# Altium PCB PCB.PcbDoc
Units mm, origin at the board's own origin, x right, y up, seen from the top; angles counter-clockwise.
Board outline 143.89 x 66.55 mm, 2 copper layers (Top Layer, Bottom Layer); 72 components, 28 nets, 160 pads, 648 vias.
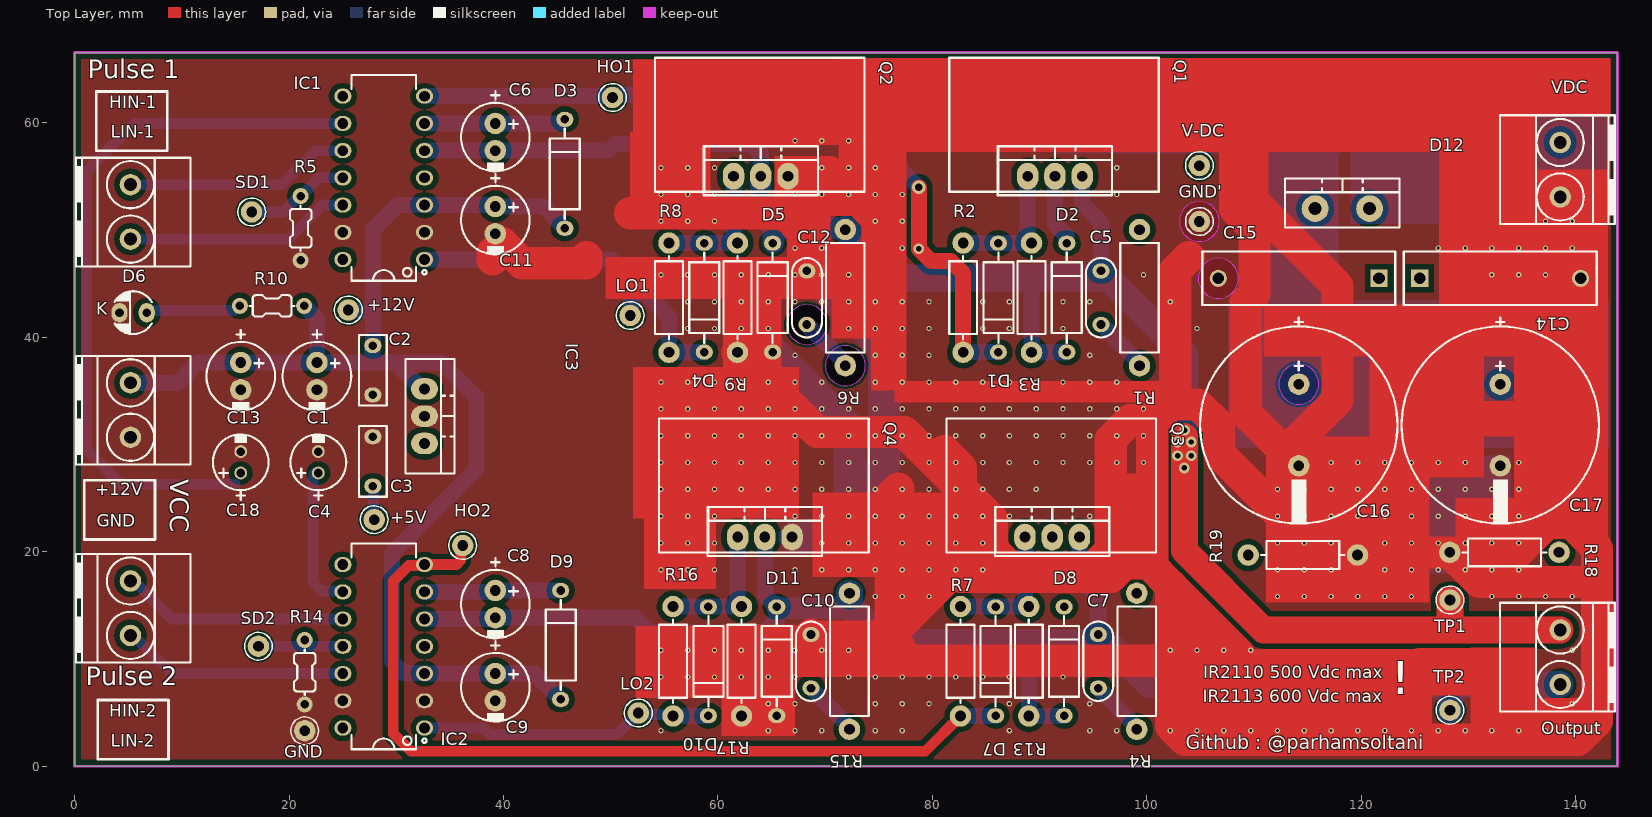
[diagram p0: Top Layer view]
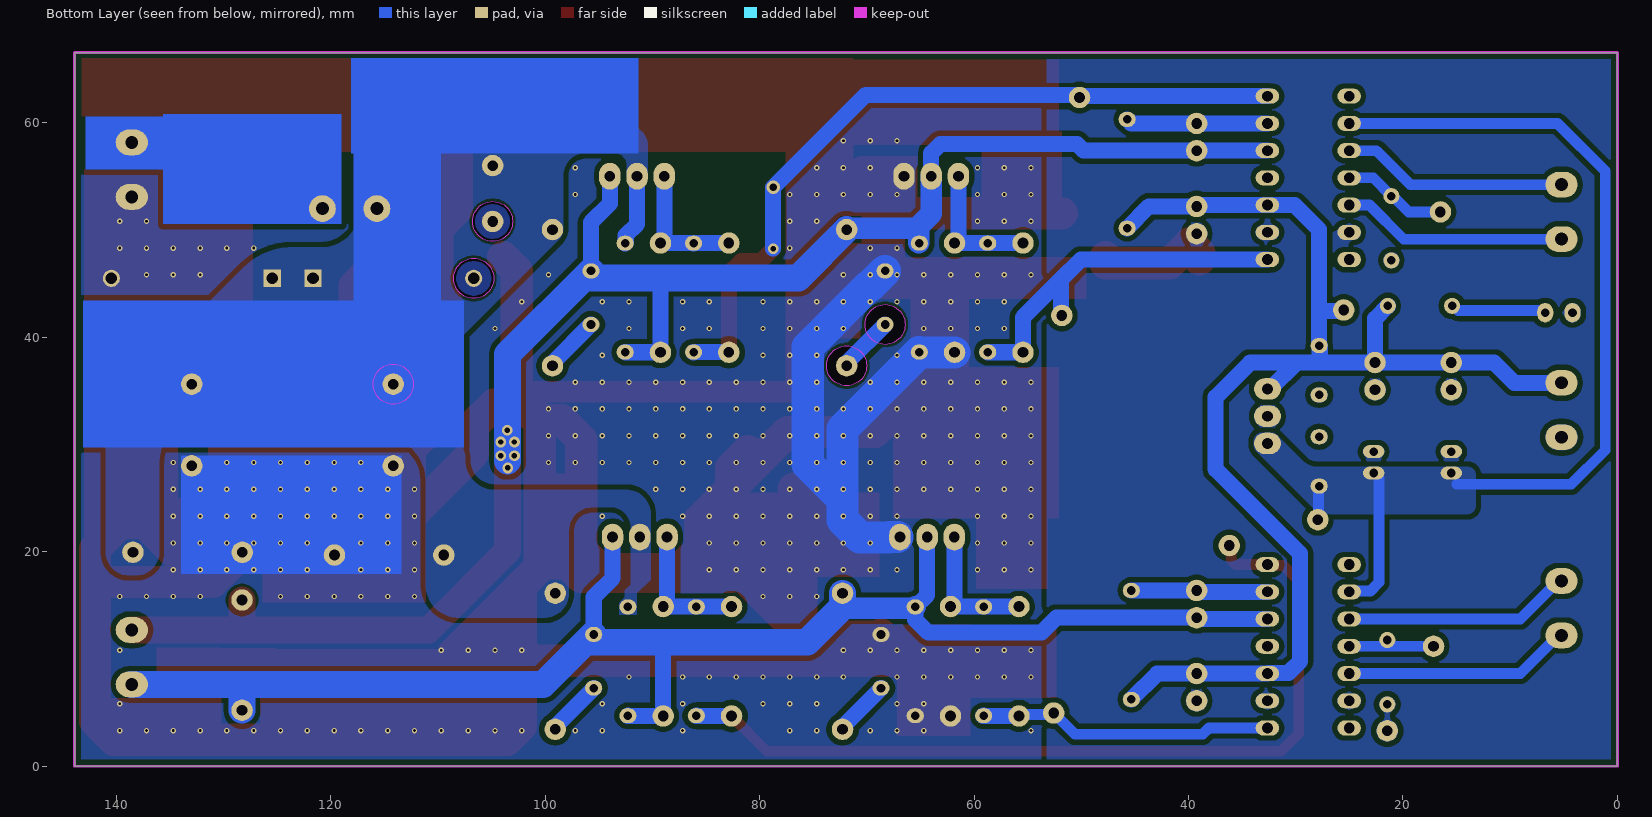
[diagram p1: Bottom Layer view, seen from below]
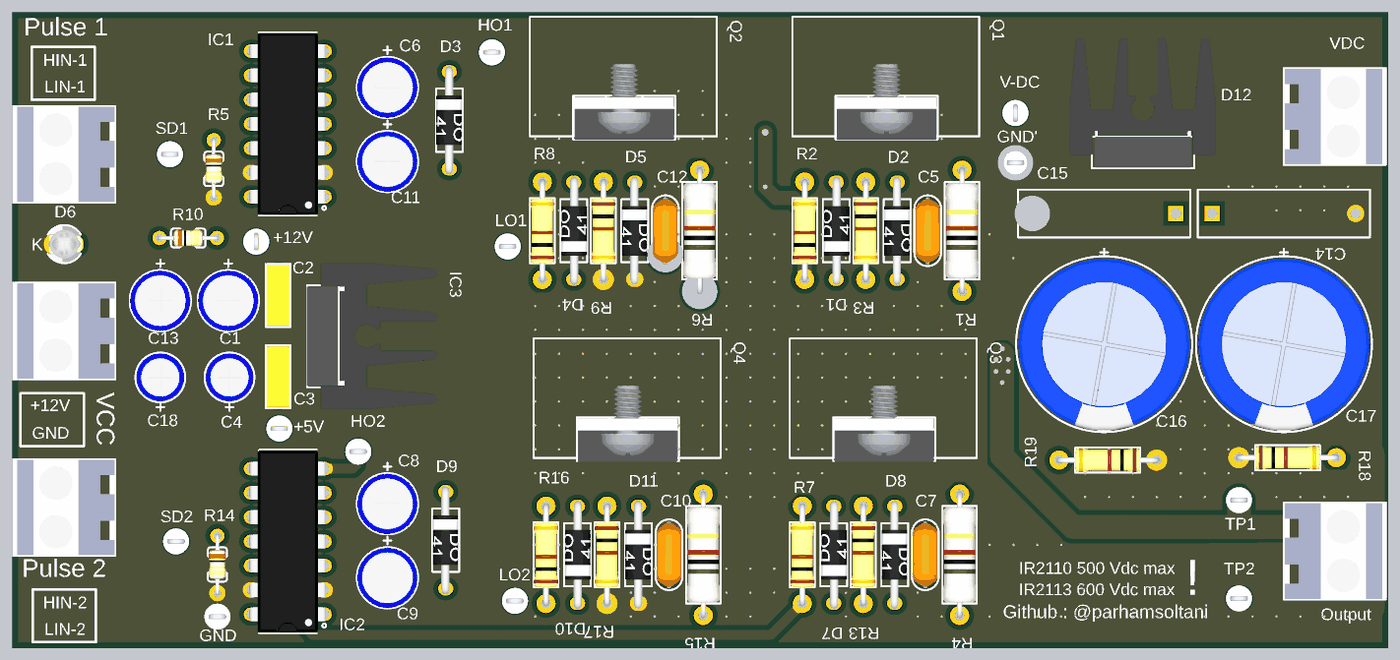
[diagram p2: 3D render of the assembled board from above, using the file's embedded part models]

## Layer stack, top to bottom
Top Solder: solder mask 0.0102, Solder Resist, Dk 3.5
Top Layer: signal copper 0.0356
Dielectric 1: dielectric 0.32, FR-4, Dk 4.8
Bottom Layer: signal copper 0.0356
Bottom Solder: solder mask 0.0102, Solder Resist, Dk 3.5

## Board outline
0,0 143.891,0 143.891,66.548 0,66.548
cut-out: 66.431,41.188 ccw(c68.297,41.188) 68.297,39.322 ccw(c68.297,41.188) 70.163,41.188 ccw(c68.297,41.188) 68.297,43.054 ccw(c68.297,41.188)
cut-out: 70.021,37.338 ccw(c71.887,37.338) 71.887,35.472 ccw(c71.887,37.338) 73.753,37.338 ccw(c71.887,37.338) 71.887,39.204 ccw(c71.887,37.338)
cut-out: 104.801,45.495 ccw(c106.667,45.495) 106.667,43.629 ccw(c106.667,45.495) 108.533,45.495 ccw(c106.667,45.495) 106.667,47.361 ccw(c106.667,45.495)
cut-out: 112.307,35.623 ccw(c114.173,35.623) 114.173,33.757 ccw(c114.173,35.623) 116.039,35.623 ccw(c114.173,35.623) 114.173,37.489 ccw(c114.173,35.623)
cut-out: 103.036,50.8 ccw(c104.902,50.8) 104.902,48.934 ccw(c104.902,50.8) 106.768,50.8 ccw(c104.902,50.8) 104.902,52.666 ccw(c104.902,50.8)

## Design rules (kind name [scope] priority, off if disabled: settings)
Clearance [All] p1: gap=0.254 ignorepadtopadclearanceinfootprint=FALSE except(0: Arc-Hole Track-Hole SMDPad-Hole THPad-Hole Via-Hole Fill-Hole Poly-Hole Region-Hole Text-Hole; 0.5: Arc-Poly Track-Poly SMDPad-Poly THPad-Poly Via-Poly Fill-Poly Poly-Poly)
PolygonConnect [All] p1: connectstyle=Direct reliefconductorwidth=0.254 reliefentries=4 polygonreliefangle="90 Angle" airgapwidth=0.254
RoutingVias [All] p1: holewidth=0.5 width=1 viastyle="Through Hole" minholewidth=0.1 minwidth=0.2 maxholewidth=2.5 maxwidth=3
SolderMaskExpansion [All] p1: expansion=0.102 istentingtop=FALSE
Width [All] p1: maxlimit=3 minlimit=0.15 preferedwidth=0.7
30 further rules are at their usual default settings.

## Components (designator, comment, footprint, x,y, rotation, side; value= is the part's Value field where it differs from the comment)
+5V "+5V" TPTHD_B_WHT 27.94,22.987 r0 top
+12V "+12V" TPTHD_B_WHT 25.527,42.545 r90 top
C1 "100uF, 25V" C_EL_6X11 22.604,36.369 r270 top
C2 "100nF" C_PLY_6X2_5 27.813,36.919 r90 top
C3 "100nF" C_PLY_6X2_5 27.813,28.419 r270 top
C4 "100uF, 10V" C_EL_5X11 22.733,28.337 r90 top
C5 "4.7nf, 1kV" RAD0.2-1 95.729,43.688 r90 top
C6 "100uF, 25V" C_EL_6X11 39.243,58.674 r270 top
C7 "4.7nf, 1kV" RAD0.2-1 95.475,9.779 r90 top
C8 "100uF, 25V" C_EL_6X11 39.243,15.113 r270 top
C9 "100uF, 25V" C_EL_6X11 39.243,7.366 r270 top
C10 "4.7nf, 1kV" RAD0.2-1 68.678,9.779 r90 top
C11 "100uF, 25V" C_EL_6X11 39.243,50.927 r270 top
C12 "4.7nf, 1kV" RAD0.2-1 68.297,43.688 r90 top
C13 "100uF, 25V" C_EL_6X11 15.494,36.369 r270 top
C14 "220nF, 600V" CAP-pitch15 132.963,45.495 r0 top
C15 "220nF, 600V" CAP-pitch15 114.167,45.495 r180 top
C16 "100uF, 500V" C_EL_18X35 114.173,31.813 r270 top
C17 "100uF, 500V" C_EL_18X35 132.969,31.813 r270 top
C18 "100uF, 10V" C_EL_5X11 15.494,28.337 r90 top
D1 "1N5818" D_AX04_DO41 86.159,43.688 r270 top
D2 "UF4007" D_AX04_DO41 92.539,43.688 r90 top
D3 "1N5818" D_AX04_DO41 45.72,55.245 r90 top
D4 "1N5818" D_AX04_DO41 58.727,43.688 r270 top
D5 "UF4007" D_AX04_DO41 65.107,43.688 r90 top
D6 "LED RED" LED3MM 5.461,42.291 r180 top
D7 "1N5818" D_AX04_DO41 85.905,9.779 r270 top
D8 "UF4007" D_AX04_DO41 92.285,9.779 r90 top
D9 "1N5818" D_AX04_DO41 45.339,11.303 r90 top
D10 "1N5818" D_AX04_DO41 59.108,9.779 r270 top
D11 "UF4007" D_AX04_DO41 65.488,9.779 r90 top
D12 "RHRP1560" TO220_21 118.237,52.003 r0 top
GND "GND" TPTHD_B_WHT 21.463,3.302 r0 top
GND' "HO" TPTHD_B_WHT 104.902,50.8 r0 top
HO1 "HO" TPTHD_B_WHT 50.165,62.357 r0 top
HO2 "HO" TPTHD_B_WHT 36.195,20.574 r0 top
IC1 "IR2110" DIP_14 28.829,54.864 r180 top
IC2 "IR2110" DIP_14 28.829,11.176 r180 top
IC3 "7805" TO220_3 32.639,32.639 r270 top
LO1 "LO" TPTHD_B_WHT 51.816,42.037 r0 top
LO2 "LO" TPTHD_B_WHT 52.578,4.953 r0 top
Output "Output" TBG_2 138.557,10.16 r270 top
"Pulse 1" "" TBG_2 5.207,51.689 r90 top
"Pulse 2" "" TBG_2 5.207,14.732 r90 top
Q1 "FCP22N60N" TO220_32 91.429,55.017 r0 top
Q2 "FCP22N60N" TO220_32 63.997,55.017 r0 top
Q3 "FCP22N60N" TO220_32 91.175,21.362 r0 top
Q4 "FCP22N60N" TO220_32 64.378,21.362 r0 top
R1 "10R, 1/2W" R05W_AX05 99.319,43.688 r270 top
R2 "10R, 1/4W" R025W_AX04 82.869,43.688 r90 top
R3 "10K, 1/4W" R025W_AX04 89.249,43.688 r270 top
R4 "10R, 1/2W" R05W_AX05 99.065,9.779 r270 top
R5 "0R, 1/8W" R0125W_AX025 21.082,50.165 r90 top
R6 "10R, 1/2W" R05W_AX05 71.887,43.688 r270 top
R7 "10R, 1/4W" R025W_AX04 82.615,9.779 r90 top
R8 "10R, 1/4W" R025W_AX04 55.437,43.688 r90 top
R9 "10K, 1/4W" R025W_AX04 61.817,43.688 r270 top
R10 "2k7, 1/8W" R0125W_AX025 18.415,42.926 r180 top
R13 "10K, 1/4W" R025W_AX04 88.995,9.779 r270 top
R14 "0R, 1/8W" R0125W_AX025 21.463,8.763 r90 top
R15 "10R, 1/2W" R05W_AX05 72.268,9.779 r270 top
R16 "10R, 1/4W" R025W_AX04 55.818,9.779 r90 top
R17 "10K, 1/4W" R025W_AX04 62.198,9.779 r270 top
R18 "100K, 1/4W" R025W_AX04 133.35,19.939 r0 top
R19 "100K, 1/4W" R025W_AX04 114.554,19.685 r180 top
SD1 "SD" TPTHD_B_WHT 16.51,51.689 r0 top
SD2 "SD" TPTHD_B_WHT 17.145,11.176 r0 top
TP1 "HO" TPTHD_B_WHT 128.27,15.494 r0 top
TP2 "HO" TPTHD_B_WHT 128.27,5.207 r0 top
V-DC "HO" TPTHD_B_WHT 104.902,56.007 r90 top
VCC "" TBG_2 5.207,33.21 r90 top
VDC "" TBG_2 138.557,55.626 r270 top

## Footprints (in the part's own frame and the unit in brackets; to place one, negate y for a bottom-side part, rotate by r counter-clockwise, add the part's x,y. Pads: shape width x height; smd on the part's side, far side on the other; paste and mask are expansions set on the pad)
C_EL_5X11 [mm] "Cap Elec, D5.0X11.0H pitch: 2mm"
  round 1.2 / inner round 1.2 / far side oval 1.2x2 hole 0.8: 1(-1,0) 2(1,0)
  silkscreen extent -3.5,-2.6 2.6,2.6, body extent -2.53,-2.53 2.53,2.53, height 2.67
C_EL_6X11 [mm] "Cap Elec, D6.3X11.0H pitch: 2.5mm"
  round 2 hole 1: 1(-1.27,0) 2(1.27,0)
  silkscreen extent -4.3,-3.2 3.2,3.2, body extent -3.17,-3.18 3.18,3.18, height 2.51
C_EL_18X35 [mm] "Cap Elec, D18.0X35.0H pitch: 7.6mm, RB.3/.7"
  round 2 hole 1: 1(-3.81,0) 2(3.81,0)
  silkscreen extent -10,-9.2 9.2,9.2, body extent -10.42,-10.42 10.47,10.41, height 35.05
C_PLY_6X2_5 [mm] "CAP, FILM MKT, 6.3X2.4mm, pitch: 4.7mm"
  oval 1.4x1.6 hole 0.8 mask+0.075: 1(-2.3,0) 2(2.3,0)
  silkscreen extent -3.3,-1.3 3.3,1.3, body extent -3.15,-1.2 3.15,1.2, height 6.34
CAP-pitch15 [mm] "THD, 2-leads, Body 18x5mm, Pitch 15mm"
  rect 1.6x1.6 hole 1.1: 1(-7.5,0)
  round 1.6 hole 1.1: 2(7.5,0)
  silkscreen extent -9,-2.5 9,2.5, body extent -9,-2.5 9,2.5, height 10.5
D_AX04_DO41 [mm] "DIODE 0.4 INCH SPACING DO-41"
  oval 1.4x1.6 hole 0.8: 1(-5.08,0) 2(5.08,0)
  silkscreen extent -4.2,-1.4 4.2,1.4, body extent -5.68,-1.32 5.68,1.4, height 2.85
DIP_14 [mm] "DIP, pitch 2.54mm, 300mil Width"
  oval 1.6x1.4 / inner round 1.4 / far side oval 2.2x1.4 hole 1: 1(-3.81,7.62) 2(-3.81,5.08) 3(-3.81,2.54) 4(-3.81,0) 5(-3.81,-2.54) 6(-3.81,-5.08) 7(-3.81,-7.62) 8(3.81,-7.62) 9(3.81,-5.08) 10(3.81,-2.54) 11(3.81,0) 12(3.81,2.54) 13(3.81,5.08) 14(3.81,7.62)
  silkscreen extent -4,-9.6 3,9.6, body extent -4,-9.53 4,9.52, height 3.81
LED3MM [mm] "LED THD 3MM"
  oval 1.5x1.8 hole 0.8: 1(-1.27,0) 2(1.27,0)
  silkscreen extent -1.73,-2 1.73,2, body extent -1.9,-1.9 1.6,1.9, height 6.5
R05W_AX05 [mm] "RESISTOR 0.5 WATT, AXIAL0.5"
  round 2 hole 1: 1(-6.35,0) 2(6.35,0)
  silkscreen extent -5.1,-1.8 5.1,1.8, body extent -6.62,-1.75 6.62,1.75, height 3.5
R025W_AX04 [mm] "RESISTOR 1/4 WATT, AXIAL0.4"
  round 2 hole 1: 1(-5.1,0) 2(5.1,0)
  silkscreen extent -3.9,-1.3 3.9,1.3, body extent -5.38,-1.28 5.38,1.28, height 2.6
R0125W_AX025 [mm] "RESISTOR 1/8 WATT, AXIAL0.25"
  round 1.5 hole 0.8: 1(-3,0) 2(3,0)
  silkscreen extent -2.1,-1 2.1,1, body extent -3.2,-0.9 3.2,0.9, height 1.9
RAD0.2-1 [mm] "CAP, CER MULTILAYER, 7.0X2.6mm, pitch: 5.0mm"
  oval 1.4x1.6 hole 0.8 mask+0.075: 1(-2.5,0) 2(2.5,0)
  silkscreen extent -3.7,-1.4 3.7,1.4, body extent -3.54,-1.3 3.54,1.3, height 9.64
TBG_2 [mm] "Terminal Block Green"
  round 2 / inner round 2 / far side oval 2.4x3 hole 1.2: 1(-2.54,0) 2(2.54,0)
  silkscreen extent -5.08,-5.6 5.05,5.08, body extent -5,-5.5 5,5, height 14
TO220_3 [mm] "TO-220 3 LEAD, TO-262, pitch: 2.54mm  10x4.5mm"
  oval 2x2.5 hole 1: 1(-2.54,0) 2(0,0) 3(2.54,0)
  silkscreen extent -5.33,-1.78 5.33,2.79, body extent -7.68,-1.85 7.62,11.88, height 26.5
TO220_21 [mm]
  round 2.5 hole 1.2: 1(-2.54,0) 2(2.54,0)
  silkscreen extent -5.33,-1.78 5.33,2.79, body extent -7.68,-1.7 7.62,11.88, height 26.5
TO220_32 [mm] "TO-220 3 LEAD, TO-262, pitch: 2.54mm  10x4.5mm"
  oval 2x2.5 hole 1: 1(-2.54,0) 2(0,0) 3(2.54,0)
  silkscreen extent -9.86,-1.78 9.69,11.05, body extent -9.56,-1.85 9.44,10.8, height 25
TPTHD_B_WHT [mm] "TEST POINT KEYSTONE 2.5mm WITH 1 mm Hole Diameter"
  round 2 hole 1: 1(0,0)
  silkscreen extent -1.29,-1.29 1.3,1.29, body extent -1.24,-1.25 1.25,1.25, height 4.58

## Part data
+5V +12V GND GND' HO1 HO2 LO1 LO2 SD1 SD2 TP1 TP2 V-DC: library part TP
C1 C4 C6 C8 C9 C11 C13 C18: library part Cap2, "200V, 330uF", Category=Capacitor, Mounting Style="Through hole"
  C1 C6 C8 C9 C11 C13: Part Number="100uF, 25V"
  C4 C18: Part Number="100uF, 10V"
C2 C3: library part Cap, "Capacitor", Package=0603, Category=Capacitor, Layer=Top, Mounting Style=SMD
C5 C7 C10 C12 C14 C15: library part Cap, Category=Capacitor, Mounting Style="Through hole"
  C5 C7 C10 C12: Part Number="4.7nf, 1kV"
  C14 C15: Part Number="220nF, 600V"
C16 C17: library part Cap2, "500HXW100MEFR18X40", Category=Capacitor, Mounting Style="Through hole", Part Number="100uF, 500V"
D1 D2 D3 D4 D5 D7 D8 D9 D10 D11: library part DIODE5, MAnufacturer="Comchip Technology", Package=DO-15, Category=Diode, Mounting Style="Through hole"
  D1 D3 D4 D7 D9 D10: Part Number=1N5818
  D2 D5 D8 D11: Part Number=UF4007
D6: library part LED0, "Typical INFRARED GaAs LED", Category=LED, Layer=Top, Mounting Style="Through Hole"
D12: library part DIODE5, Category=Diode, Mounting Style="Through hole", Part Number=RHRP1560
Output "Pulse 1" "Pulse 2" VCC VDC: library part "Header 2", "Header, 2-Pin"
  Output: Part Number=Output
Q1 Q2 Q3 Q4: library part NMOS-2, "N-Channel Power MOSFET", Package=TO-247, Category=transistor, Part Number=FCP22N60N
R1 R2 R3 R4 R5 R6 R7 R8 R9 R10 R13 R14 R15 R16 R17 R18 R19: library part Res1, "Resistor", Category=Resistor, Mounting Style="Through hole"
  R1 R4 R6 R15: Part Number="10R, 1/2W"
  R2 R7 R8 R16: Part Number="10R, 1/4W"
  R3 R9 R13 R17: Part Number="10K, 1/4W"
  R5 R14: Part Number="0R, 1/8W"
  R10: Part Number="2k7, 1/8W"
  R18 R19: Part Number="100K, 1/4W"
IC3: Text Field1=80, Text Field2=40

## Via types
v1: diameter 0.5, hole 0.25, Top Layer to Bottom Layer, tented both sides, 640 vias
v2: diameter 1, hole 0.5, Top Layer to Bottom Layer, tented both sides, 7 vias
v3: diameter 1.27, hole 0.711, Top Layer to Bottom Layer, tented both sides, 1 vias

## Nets (pads, with @x,y where several pads share a name; then routed paths per layer and width w, separated by ;. In a path a pad name is that pad's centre, name@x,y a point inside that pad or via, vN(x,y) a via of type N, cw(c..) or ccw(c..) an arc to the next point about the centre after c; other vN are vias at no path point)
+5V: +5V.1 C3.2 C4.1 C18.1 IC1.9 IC2.9 IC3.3 | length 83.9
  Bottom Layer w1: 14.986,26.289 4.318,26.289 1.143,29.464 1.143,55.499 5.588,59.944 IC1.9 ; C4.1 22.387,27.337 22.295,27.245 22.295,26.899 22.225,26.829 22.225,17.145 23.037,16.333 24.942,16.333 IC2.9 ; C3.2 27.877,26.056 27.877,23.05 +5V.1
+12V: +12V.1 C1.1 C2.2 C9.1 C11.1 C13.1 D3.1 D9.1 IC1.3 IC2.3 IC3.1 R10.1 VCC.2 | length 123.7
  Bottom Layer w1.5: VCC.2 9.61,35.75 11.499,37.639 C13.1 C1.1 ; R10.1 22.604,41.737 C1.1 ; +12V.1 25.623,42.449 27.655,42.449 27.813,42.291 ; IC3.1 32.389,35.179 29.929,37.639 ; D9.1 42.926,8.636 C9.1 IC2.3 32.589,8.686 30.684,8.686 29.591,9.779 29.591,19.812 37.465,27.686 37.465,34.417 34.243,37.639 29.929,37.639 ; D3.1 43.688,52.197 C11.1 39.243,52.324 IC1.3 30.099,52.324 27.813,50.038 27.813,42.291 ; C1.1 27.686,37.639 ; 27.686,37.639 29.929,37.639 ; 27.686,37.639 27.763,37.716 27.763,39.169 C2.2 27.813,42.291
GND: C1.2 C2.1 C3.1 C4.2 C9.2 C10.2 C11.2 C12.2 C13.2 C14.2 C15.2 C16.2 C17.2 C18.2 D5.1 D6.2 D11.1 GND'.1 GND.1 IC1.2 IC1.13 IC2.2 IC2.13 IC3.2 Q2.3 Q4.3 R5.1 R9.2 R14.1 R17.2 R18.1 R19.1 VCC.1 VDC.2 | length 556.6
  Top Layer w2: Q2.3 66.537,55.267 67.15,55.88 69.94,55.88 70.395,55.425
  Top Layer w3: 38.989,47.244 38.989,47.879 39.878,48.768 41.752,46.894 47.752,46.894 47.752,47.483 ; 51.831,51.562 66.188,51.562 67.945,49.805 C12.2@67.945,46.54 ; R9.2 69.236,31.169 77.416,31.169 82.677,25.908 ; D11.1 64.008,6.179 64.008,9.967 ; C10.2 68.892,12.065 75.906,12.065 77.026,10.945 ; 69.47,11.642 65.683,11.642 64.008,9.967 ; 70.395,55.425 76.073,49.747 76.073,41.656 ; 76.835,25.908 76.12,25.193 76.12,12.279 82.677,18.836 82.677,25.908 ; 81.103,29.387 82.677,27.813 82.677,25.908 ; 82.677,17.633 96.674,17.633 97.924,18.883 100.206,18.883 102.273,16.815 ; 100.501,18.844 100.501,32.258 ; 103.908,47.496 102.649,46.237 102.649,34.642 100.501,32.494 100.501,32.258 ; 107.188,59.69 107.298,59.69 108.211,58.777 108.211,51.95 110.033,50.129 110.033,44.101 109.23,43.297 109.23,32.946 C16.2 114.173,30.503 117.793,34.124 117.793,44.764 109.855,52.702 109.855,60.071 ; 125.476,9.525 130.257,9.525 134.916,4.866 141.137,4.866 141.986,5.715 ; 64.008,9.967 64.149,9.825 101.191,9.825 102.273,10.907 102.273,16.815 ; 82.677,25.908 85.538,23.047 85.538,20.314 87.494,18.358 94.856,18.358 96.64,20.143 96.64,30.473 98.425,32.258 100.501,32.258 ; 100.501,32.258 100.781,32.258 102.261,33.738 104.749,33.738 106.731,31.757 106.731,29.159 115.951,19.939 R18.1 ; 102.273,16.815 108.566,10.522 104.643,10.522 103.608,11.557 103.608,9.422 102.273,10.757 102.273,3.756 103.576,2.453 140.229,2.453 141.986,4.21 141.986,5.715 ; R18.1 134.555,19.939 137.309,22.693 139.591,22.693 141.986,20.298 141.986,17.399 ; R18.1 131.004,17.185 141.772,17.185 141.986,17.399 ; 141.986,5.715 141.986,17.399
  Bottom Layer w3: R9.2 65.087,38.588 D5.1 72.263,31.452 72.263,24.892 ; Q4.3@67.132,21.362 67.919,21.362 67.945,21.336 70.633,21.336 72.263,22.966 72.263,24.892 ; C12.2 69.749,44.736 69.868,44.736 75.507,39.097 75.507,28.136 72.263,24.892
  other v1: 54.686,3.315 54.686,3.315 64.686,3.315 64.686,3.315 67.186,3.315 67.186,3.315 69.686,3.315 69.686,3.315 74.686,3.315 74.686,3.315 77.186,3.315 77.186,3.315 87.186,3.315 87.186,3.315 94.686,3.315 94.686,3.315 97.186,3.315 97.186,3.315 102.186,3.315 102.186,3.315 104.686,3.315 104.686,3.315 107.186,3.315 107.186,3.315 109.686,3.315 109.686,3.315 112.186,3.315 112.186,3.315 114.686,3.315 114.686,3.315 117.186,3.315 117.186,3.315 119.686,3.315 119.686,3.315 122.186,3.315 122.186,3.315 124.686,3.315 124.686,3.315 127.186,3.315 127.186,3.315 129.686,3.315 129.686,3.315 132.186,3.315 132.186,3.315 134.686,3.315 134.686,3.315 137.186,3.315 137.186,3.315 139.686,3.315 139.686,3.315 64.686,5.815 64.686,5.815 67.186,5.815 67.186,5.815 74.686,5.815 74.686,5.815 77.186,5.815 77.186,5.815 79.686,5.815 79.686,5.815 87.186,5.815 87.186,5.815 94.686,5.815 94.686,5.815 139.686,5.815 139.686,5.815 54.686,8.315 54.686,8.315 57.186,8.315 57.186,8.315 59.686,8.315 59.686,8.315 62.186,8.315 62.186,8.315 64.686,8.315 64.686,8.315 67.186,8.315 67.186,8.315 72.186,8.315 72.186,8.315 74.686,8.315 74.686,8.315 77.186,8.315 77.186,8.315 79.686,8.315 79.686,8.315 82.186,8.315 82.186,8.315 84.686,8.315 84.686,8.315 87.186,8.315 87.186,8.315 92.186,8.315 92.186,8.315 54.686,10.815 54.686,10.815 57.186,10.815 57.186,10.815 59.686,10.815 59.686,10.815 62.186,10.815 62.186,10.815 64.686,10.815 64.686,10.815 67.186,10.815 67.186,10.815 69.686,10.815 69.686,10.815 72.186,10.815 72.186,10.815 102.186,10.815 102.186,10.815 104.686,10.815 104.686,10.815 107.186,10.815 107.186,10.815 109.686,10.815 109.686,10.815 139.686,10.815 139.686,10.815 74.686,15.815 74.686,15.815 77.186,15.815 77.186,15.815 79.686,15.815 79.686,15.815 112.186,15.815 112.186,15.815 114.686,15.815 114.686,15.815 117.186,15.815 117.186,15.815 119.686,15.815 119.686,15.815 122.186,15.815 122.186,15.815 124.686,15.815 124.686,15.815 132.186,15.815 132.186,15.815 134.686,15.815 134.686,15.815 137.186,15.815 137.186,15.815 139.686,15.815 139.686,15.815 54.686,18.315 54.686,18.315 57.186,18.315 57.186,18.315 59.686,18.315 59.686,18.315 67.186,18.315 67.186,18.315 69.686,18.315 69.686,18.315 72.186,18.315 72.186,18.315 74.686,18.315 74.686,18.315 77.186,18.315 77.186,18.315 79.686,18.315 79.686,18.315 82.186,18.315 82.186,18.315 84.686,18.315 84.686,18.315 112.186,18.315 112.186,18.315 114.686,18.315 114.686,18.315 117.186,18.315 117.186,18.315 122.186,18.315 122.186,18.315 124.686,18.315 124.686,18.315 127.186,18.315 127.186,18.315 129.686,18.315 129.686,18.315 132.186,18.315 132.186,18.315 134.686,18.315 134.686,18.315 54.686,20.815 54.686,20.815 57.186,20.815 57.186,20.815 59.686,20.815 59.686,20.815 69.686,20.815 69.686,20.815 72.186,20.815 72.186,20.815 74.686,20.815 74.686,20.815 77.186,20.815 77.186,20.815 79.686,20.815 79.686,20.815 82.186,20.815 82.186,20.815 84.686,20.815 84.686,20.815 112.186,20.815 112.186,20.815 114.686,20.815 114.686,20.815 117.186,20.815 117.186,20.815 122.186,20.815 122.186,20.815 124.686,20.815 124.686,20.815 127.186,20.815 127.186,20.815 129.686,20.815 129.686,20.815 132.186,20.815 132.186,20.815 134.686,20.815 134.686,20.815 54.686,23.315 54.686,23.315 57.186,23.315 57.186,23.315 59.686,23.315 59.686,23.315 67.186,23.315 67.186,23.315 69.686,23.315 69.686,23.315 72.186,23.315 72.186,23.315 74.686,23.315 74.686,23.315 77.186,23.315 77.186,23.315 79.686,23.315 79.686,23.315 82.186,23.315 82.186,23.315 84.686,23.315 84.686,23.315 87.186,23.315 87.186,23.315 94.686,23.315 94.686,23.315 112.186,23.315 112.186,23.315 114.686,23.315 114.686,23.315 117.186,23.315 117.186,23.315 119.686,23.315 119.686,23.315 122.186,23.315 122.186,23.315 124.686,23.315 124.686,23.315 127.186,23.315 127.186,23.315 129.686,23.315 129.686,23.315 132.186,23.315 132.186,23.315 134.686,23.315 134.686,23.315 54.686,25.815 54.686,25.815 57.186,25.815 57.186,25.815 59.686,25.815 59.686,25.815 62.186,25.815 62.186,25.815 64.686,25.815 64.686,25.815 67.186,25.815 67.186,25.815 69.686,25.815 69.686,25.815 72.186,25.815 72.186,25.815 74.686,25.815 74.686,25.815 77.186,25.815 77.186,25.815 79.686,25.815 79.686,25.815 82.186,25.815 82.186,25.815 84.686,25.815 84.686,25.815 87.186,25.815 87.186,25.815 89.686,25.815 89.686,25.815 112.186,25.815 112.186,25.815 114.686,25.815 114.686,25.815 117.186,25.815 117.186,25.815 119.686,25.815 119.686,25.815 122.186,25.815 122.186,25.815 124.686,25.815 124.686,25.815 127.186,25.815 127.186,25.815 129.686,25.815 129.686,25.815 132.186,25.815 132.186,25.815 134.686,25.815 134.686,25.815 54.686,28.315 54.686,28.315 57.186,28.315 57.186,28.315 59.686,28.315 59.686,28.315 62.186,28.315 62.186,28.315 64.686,28.315 64.686,28.315 67.186,28.315 67.186,28.315 69.686,28.315 69.686,28.315 72.186,28.315 72.186,28.315 74.686,28.315 74.686,28.315 77.186,28.315 77.186,28.315 79.686,28.315 79.686,28.315 82.186,28.315 82.186,28.315 84.686,28.315 84.686,28.315 87.186,28.315 87.186,28.315 89.686,28.315 89.686,28.315 92.186,28.315 92.186,28.315 94.686,28.315 94.686,28.315 97.186,28.315 97.186,28.315 99.686,28.315 99.686,28.315 117.186,28.315 117.186,28.315 119.686,28.315 119.686,28.315 122.186,28.315 122.186,28.315 124.686,28.315 124.686,28.315 127.186,28.315 127.186,28.315 129.686,28.315 129.686,28.315 134.686,28.315 134.686,28.315 54.686,30.815 54.686,30.815 57.186,30.815 57.186,30.815 59.686,30.815 59.686,30.815 62.186,30.815 62.186,30.815 64.686,30.815 64.686,30.815 67.186,30.815 67.186,30.815 69.686,30.815 69.686,30.815 72.186,30.815 72.186,30.815 74.686,30.815 74.686,30.815 77.186,30.815 77.186,30.815 79.686,30.815 79.686,30.815 82.186,30.815 82.186,30.815 84.686,30.815 84.686,30.815 87.186,30.815 87.186,30.815 89.686,30.815 89.686,30.815 92.186,30.815 92.186,30.815 94.686,30.815 94.686,30.815 97.186,30.815 97.186,30.815 99.686,30.815 99.686,30.815 54.686,33.315 54.686,33.315 57.186,33.315 57.186,33.315 59.686,33.315 59.686,33.315 62.186,33.315 62.186,33.315 64.686,33.315 64.686,33.315 67.186,33.315 67.186,33.315 69.686,33.315 69.686,33.315 72.186,33.315 72.186,33.315 74.686,33.315 74.686,33.315 77.186,33.315 77.186,33.315 79.686,33.315 79.686,33.315 82.186,33.315 82.186,33.315 84.686,33.315 84.686,33.315 87.186,33.315 87.186,33.315 89.686,33.315 89.686,33.315 92.186,33.315 92.186,33.315 94.686,33.315 94.686,33.315 97.186,33.315 97.186,33.315 99.686,33.315 99.686,33.315 54.686,35.815 54.686,35.815 57.186,35.815 57.186,35.815 59.686,35.815 59.686,35.815 62.186,35.815 62.186,35.815 64.686,35.815 64.686,35.815 67.186,35.815 67.186,35.815 69.686,35.815 69.686,35.815 74.686,35.815 74.686,35.815 77.186,35.815 77.186,35.815 79.686,35.815 79.686,35.815 82.186,35.815 82.186,35.815 84.686,35.815 84.686,35.815 87.186,35.815 87.186,35.815 89.686,35.815 89.686,35.815 92.186,35.815 92.186,35.815 94.686,35.815 94.686,35.815 97.186,35.815 97.186,35.815 67.186,38.315 67.186,38.315 74.686,38.315 74.686,38.315 77.186,38.315 77.186,38.315 79.686,38.315 79.686,38.315 94.686,38.315 94.686,38.315 57.186,40.815 57.186,40.815 59.686,40.815 59.686,40.815 62.186,40.815 62.186,40.815 64.686,40.815 64.686,40.815 72.186,40.815 72.186,40.815 74.686,40.815 74.686,40.815 77.186,40.815 77.186,40.815 79.686,40.815 79.686,40.815 84.686,40.815 84.686,40.815 87.186,40.815 87.186,40.815 92.186,40.815 92.186,40.815 104.686,40.815 104.686,40.815 57.186,43.315 57.186,43.315 59.686,43.315 59.686,43.315 62.186,43.315 62.186,43.315 64.686,43.315 64.686,43.315 67.186,43.315 67.186,43.315 69.686,43.315 69.686,43.315 72.186,43.315 72.186,43.315 74.686,43.315 74.686,43.315 77.186,43.315 77.186,43.315 79.686,43.315 79.686,43.315 84.686,43.315 84.686,43.315 87.186,43.315 87.186,43.315 92.186,43.315 92.186,43.315 94.686,43.315 94.686,43.315 102.186,43.315 102.186,43.315 54.686,45.815 54.686,45.815 57.186,45.815 57.186,45.815 59.686,45.815 59.686,45.815 62.186,45.815 62.186,45.815 64.686,45.815 64.686,45.815 67.186,45.815 67.186,45.815 69.686,45.815 69.686,45.815 72.186,45.815 72.186,45.815 99.686,45.815 99.686,45.815 132.186,45.815 132.186,45.815 134.686,45.815 134.686,45.815 137.186,45.815 137.186,45.815 67.186,48.315 67.186,48.315 69.686,48.315 69.686,48.315 77.186,48.315 77.186,48.315 127.186,48.315 127.186,48.315 129.686,48.315 129.686,48.315 132.186,48.315 132.186,48.315 134.686,48.315 134.686,48.315 137.186,48.315 137.186,48.315 139.686,48.315 139.686,48.315 54.686,50.815 54.686,50.815 57.186,50.815 57.186,50.815 59.686,50.815 59.686,50.815 74.686,50.815 74.686,50.815 77.186,50.815 77.186,50.815 137.186,50.815 137.186,50.815 139.686,50.815 139.686,50.815 54.686,53.315 54.686,53.315 57.186,53.315 57.186,53.315 59.686,53.315 59.686,53.315 67.186,53.315 67.186,53.315 69.686,53.315 69.686,53.315 72.186,53.315 72.186,53.315 74.686,53.315 74.686,53.315 77.186,53.315 77.186,53.315 97.186,53.315 97.186,53.315 54.686,55.815 54.686,55.815 57.186,55.815 57.186,55.815 59.686,55.815 59.686,55.815 69.686,55.815 69.686,55.815 72.186,55.815 72.186,55.815 74.686,55.815 74.686,55.815 97.186,55.815 97.186,55.815 67.186,58.315 67.186,58.315 69.686,58.315 69.686,58.315 72.186,58.315 72.186,58.315
HIN1: "Pulse 1.2" IC1.10 | length 21.1
  Bottom Layer w1: 5.207,54.229 19.304,54.229 22.479,57.404 IC1.10
HIN2: "Pulse 2.2" IC2.10 | length 21.3
  Bottom Layer w1: 5.207,17.272 5.507,17.272 9.063,13.716 IC2.10
LIN1: "Pulse 1.1" IC1.12 | length 21.1
  Bottom Layer w1: 5.207,49.149 19.939,49.149 23.114,52.324 IC1.12
LIN2: "Pulse 2.1" IC2.12 | length 21.3
  Bottom Layer w1: 5.207,12.192 5.507,12.192 9.063,8.636 IC2.12
NetC5_1: C5.1 R1.2 | length 5.3
  Bottom Layer w1.5: C5.1 99.223,37.694 99.223,37.434 R1.2
NetC5_2: C5.2 C6.2 D2.1 D5.2 IC1.5 Output.1 Q1.3 Q2.2 R3.2 R6.1 TP1.1 | length 166.2
  Top Layer w2.5: 103.505,30.734 103.505,20.088 110.893,12.7 127.889,12.7 ; TP1.1 128.27,13.081 127.889,12.7 ; Output.1 127.889,12.7
  Bottom Layer w1.5: IC1.5 C6.2 49.784,57.404 50.419,58.039 63.129,58.039 64.008,57.16 64.008,55.028 Q2.2 ; D5.2 D5.2@65.157,48.818 ; 65.157,49.973 65.349,50.165 ; 89.027,45.527 89.249,45.305 R3.2 89.259,38.598 92.529,38.598 D2.1 ; Q1.3 93.969,52.461 95.729,50.701 C5.2
  Bottom Layer w2: Q2.2 63.997,51.517 65.349,50.165 71.76,50.165 R6.1 ; D5.2@65.157,48.818 65.157,49.973
  Bottom Layer w2.5: R6.1 76.398,45.527 89.027,45.527 C5.2@96.045,45.527 ; C5.2 103.505,38.412 103.505,28.448
  other v2: 103.505,27.813 102.87,28.956 104.14,28.956 102.87,30.226 104.14,30.226 103.538,31.337
NetC6_1: C6.1 D3.2 IC1.6 | length 13.2
  Bottom Layer w1.5: IC1.6 C6.1 45.339,59.944 D3.2
NetC7_1: C7.1 R4.2 | length 5.3
  Bottom Layer w1.5: C7.1 98.969,3.785 98.969,3.525 R4.2
NetC7_2: C7.2 C8.2 D8.1 D11.2 IC2.5 Output.2 Q3.3 Q4.2 R13.2 R15.1 TP2.1 | length 142.8
  Bottom Layer w1.5: IC2.5 39.243,13.716 C8.2 52.324,13.843 53.721,12.446 64.262,12.446 65.488,13.672 D11.2 64.389,15.958 64.389,20.881 64.378,20.892 Q4.2 ; 89.154,11.556 88.995,11.397 R13.2 89.005,4.689 92.275,4.689 D8.1 ; Q3.3 93.715,17.533 95.475,15.773 C7.2
  Bottom Layer w2: D11.2 65.615,14.732 72.39,14.732 ; C7.2 C7.2@95.544,12.279
  Bottom Layer w2.5: R15.1 72.268,14.854 72.39,14.732 75.566,11.556 89.154,11.556 95.787,11.556 ; C7.2@95.544,12.279 100.203,7.62 128.27,7.62 ; TP2.1 128.27,7.62 ; Output.2 128.27,7.62
NetC8_1: C8.1 D9.2 IC2.6 | length 12.8
  Bottom Layer w1.5: IC2.6 39.243,16.256 C8.1 D9.2
NetC10_1: C10.1 R15.2 | length 5.3
  Bottom Layer w1.5: C10.1 72.172,3.785 72.172,3.525 R15.2
NetC12_1: C12.1 R6.2 | length 5.3
  Bottom Layer w1.5: C12.1 71.791,37.694 71.791,37.434 R6.2
NetD1_1: D1.1 Q1.1 R2.2 R3.1 | length 12.8
  Bottom Layer w1.5: R2.2 82.879,48.778 86.149,48.778 D1.1 86.169,48.778 89.239,48.778 R3.1 89.249,48.923 88.889,49.283 Q1.1
NetD1_2: D1.2 HO1.1 IC1.7 R2.1 | length 77.2
  Top Layer w1.5: v3(78.74,53.975) v2(78.74,48.26) 79.893,47.107 81.716,47.107 82.869,45.954 R2.1
  Bottom Layer w1.5: IC1.7 50.165,62.484 HO1.1@50.292,62.357 ; HO1.1 50.3,62.357 50.554,62.611 70.104,62.611 v3(78.74,53.975) v2(78.74,48.26) ; R2.1 82.869,38.608 D1.2 D1.2@86.149,38.598
NetD4_1: D4.1 Q2.1 R8.2 R9.1 | length 12.8
  Bottom Layer w1.5: R8.2 R9.1 61.817,48.923 61.457,49.283 Q2.1
NetD4_2: D4.2 IC1.1 LO1.1 R8.1 | length 34.9
  Bottom Layer w1.5: IC1.1 50.038,47.244 51.943,45.339 ; LO1.1 51.891,42.112 51.891,45.287 51.943,45.339 ; D4.2 58.717,38.598 55.447,38.598 R8.1 55.437,41.845 51.943,45.339
NetD6_1: D6.1 R10.2 | length 8.9
  Bottom Layer w1: D6.1 6.93,42.49 14.843,42.49 15.28,42.926 R10.2
NetD7_1: D7.1 Q3.1 R7.2 R13.1 | length 13
  Bottom Layer w1.5: R7.2 R13.1 88.995,15.014 88.635,15.374 Q3.1
NetD7_2: D7.2 HO2.1 IC2.7 R7.1 | length 81.2
  Top Layer w1: HO2.1 36.004,20.383 36.004,19.19 35.609,18.796 IC2.7 32.562,18.719 31.165,18.719 29.718,17.272 29.718,3.048 31.369,1.397 79.333,1.397 R7.1
  Bottom Layer w1: HO2.1@36.068,20.447 HO2.1
  Bottom Layer w1.5: R7.1 82.625,4.689 85.895,4.689 D7.2
NetD10_1: D10.1 Q4.1 R16.2 R17.1 | length 13
  Bottom Layer w1.5: R16.2 R17.1 62.198,15.014 61.838,15.374 Q4.1
NetD10_2: D10.2 IC2.1 LO2.1 R16.1 | length 27.7
  Bottom Layer w1: IC2.1 38.1,3.556 38.686,2.97 50.595,2.97 LO2.1 52.715,4.816 55.681,4.816 R16.1
  Bottom Layer w1.5: R16.1 55.828,4.689 59.098,4.689 D10.2
NetD12_2: D12.2 VDC.1
NetIC1_11: IC1.11 R5.2 SD1.1 | length 9.8
  Bottom Layer w1: SD1.1 19.471,51.689 20.947,53.165 R5.2 22.781,54.864 IC1.11
NetIC2_11: IC2.11 R14.2 SD2.1 | length 7.9
  Bottom Layer w1: SD2.1 IC2.11
VDC: C14.1 C15.1 C16.1 C17.1 D2.2 D8.2 D12.1 Q1.2 Q3.2 R1.1 R4.1 R18.2 R19.2 V-DC.1 | length 6.7
  Bottom Layer w1.5: Q1.2 91.429,50.557 92.489,49.497 92.489,48.818 D2.2
pads on no net: IC1.4 IC1.8 IC1.14 IC2.4 IC2.8 IC2.14

## Polygon pours and split planes (outlines as drawn)
no net on Bottom Layer "NONET_L-01_P-001" (solid, pour order 7): 0,66.548 53.213,66.548 53.213,0 0,0
GND on Bottom Layer "GND_L02_P009" (solid, remove dead copper, pour order 9): -2.54,70.358 -2.413,70.485 147.32,70.485 147.32,-4.191 147.066,-4.445 146.558,-3.937 -2.54,-3.937
VDC on Bottom Layer "NONET_L-01_P-001" (solid, pour order 4): 92.411,54.849 92.411,56.089 cw(c93.472,56.089) 93.472,57.15 96.266,57.15 cw(c96.266,55.081) 98.335,55.081 98.335,50.053 ccw(c99.689,50.053) 98.732,49.096 110.422,37.406 cw(c108.42,35.403) 111.252,35.402 111.252,34.979 cw(c108.056,34.979) 110.316,32.719 108.399,30.802 ccw(c110.709,28.492) 107.442,28.492 cw(c104.732,28.491) 104.731,25.781 92.456,25.781 ccw(c92.456,23.495) 90.17,23.495 90.17,17.399 91.44,16.129 91.44,14.097 93.091,14.097 93.091,15.24 92.583,15.748 92.583,16.383 92.031,16.935 92.031,22.308 cw(c93.853,22.308) 93.853,24.13 95.631,24.13 cw(c95.631,21.971) 97.79,21.971 97.79,16.129 ccw(c100.076,16.129) 100.076,13.843 108.077,13.843 ccw(c108.077,16.891) 111.125,16.891 111.125,26.534 cw(c115.439,26.534) 112.389,29.585 114.06,31.256 ccw(c109.188,36.128) 116.078,36.128 116.078,38.227 cw(c121.031,38.227) 121.031,43.18 124.017,43.18 cw(c124.017,38.126) 127.591,41.7 130.01,39.281 cw(c126.851,36.123) 131.318,36.123 ccw(c134.516,36.123) 132.255,33.861 134.664,31.452 cw(c131.396,28.185) 136.017,28.185 136.017,19.939 ccw(c138.176,19.939) 138.176,17.78 138.811,17.78 ccw(c138.811,19.939) 140.97,19.939 140.97,30.44 ccw(c133.209,30.44) 138.697,35.928 128.061,46.564 ccw(c123.66,42.163) 123.66,48.387 120.904,48.387 cw(c120.904,52.07) 117.221,52.07 ccw(c116.301,52.07) 116.952,52.72 112.816,56.856 ccw(c105.668,49.708) 105.668,59.817 92.456,59.817 ccw(c92.456,57.785) 90.424,57.785 90.424,54.864 92.456,54.864
+5V on Bottom Layer "NONET_L-01_P-001" (solid, pour order 2): 31.733,30.876 29.302,28.445 cw(c28.04,29.707) 28.04,27.922 13.952,27.922 ccw(c13.952,27.178) 13.208,27.178 13.208,24.257 ccw(c13.97,24.257) 13.97,23.495 26.692,23.495 ccw(c26.692,26.202) 28.606,24.288 33.692,29.374 ccw(c33.169,29.898) 33.909,29.898 33.909,30.353 ccw(c33.163,30.353) 33.163,31.099 32.271,31.099 ccw(c32.271,30.338)
GND on Top Layer "NONET_L-01_P-001" (solid, pour order 6): 0,66.548 53.213,66.548 53.213,0 0,0
GND on Top Layer "GND_L01_P010" (solid, remove dead copper, pour order 10): -4.826,70.358 156.845,70.358 156.972,70.231 151.892,65.151 151.892,-19.177 147.447,-14.732 -6.731,-14.732
GND on Top Layer "NONET_L-01_P-001" (solid, pour order 8): 141.986,52.197 141.986,34.869 cw(c133.844,34.869) 139.601,29.111 130.116,19.626 cw(c128.112,21.63) 128.112,18.796 120.554,18.796 cw(c120.554,22.243) 118.116,19.806 106.076,31.846 ccw(c104.163,29.933) 104.068,32.637 102.667,32.587 ccw(c102.719,31.088) 101.219,31.088 101.219,26.988 cw(c98.471,26.988) 98.471,24.24 75.421,24.24 ccw(c75.421,18.542) 69.723,18.542 69.723,12.529 cw(c66.457,12.529) 68.766,10.219 67.685,9.138 ccw(c70.735,6.087) 66.421,6.087 66.421,4.699 cw(c65.278,4.699) 65.278,3.556 61.849,3.556 cw(c61.849,4.191) 61.214,4.191 61.214,5.102 cw(c63.001,5.102) 61.737,6.365 65.919,10.547 ccw(c62.869,13.598) 67.183,13.598 67.183,18.31 ccw(c65.09,18.31) 66.57,19.79 cw(c68.135,21.355) 65.922,21.355 65.922,28.97 ccw(c57.085,28.97) 63.333,35.219 61.177,37.375 cw(c62.007,38.205) 60.833,38.205 60.833,38.673 cw(c65.581,38.673) 62.224,42.031 67.041,46.848 ccw(c65.777,48.111) 67.564,48.111 67.564,50.261 ccw(c64.424,50.261) 66.644,52.482 66.146,52.98 cw(c67.551,54.385) 65.564,54.385 65.564,55.912 cw(c66.04,55.912) 66.04,56.388 67.056,56.388 cw(c67.056,55.88) 67.564,55.88 67.564,54.969 ccw(c69.044,54.969) 67.998,53.922 68.856,53.064 cw(c67.376,51.584) 69.469,51.584 69.469,47.358 ccw(c75.264,47.358) 71.166,43.261 77.415,37.012 ccw(c84.293,43.891) 84.293,34.163 97.663,34.163 ccw(c97.663,39.37) 102.87,39.37 102.87,51.407 cw(c104.676,51.407) 104.676,53.213 105.962,53.213 cw(c105.962,49.946) 108.272,52.256 127.357,33.171 ccw(c132.015,37.83) 132.015,31.242 133.096,31.242 ccw(c133.096,35.052) 136.906,35.052 136.906,52.324 cw(c138.811,52.324) 138.811,54.229 139.954,54.229 cw(c139.954,52.197)

## Keep-outs
Keep-Out Layer:
  the board outline again, w0.254

## Other copper
Top Layer:
  rectangle net GND: 111.125,15.24 126.365,30.734
  rectangle net GND: 102.997,11.811 104.648,15.621
  rectangle net GND: 82.55,19.05 84.709,20.701
  rectangle net GND: 124.206,6.604 131.953,8.89
  rectangle net GND: 130.175,2.667 136.271,11.049
  rectangle net GND: 51.816,52.832 59.309,59.182
  rectangle net GND: 52.324,6.35 62.611,13.081
  rectangle net GND: 53.086,16.51 59.817,24.257
  rectangle net GND: 102.108,2.159 126.619,10.922
  rectangle net GND: 96.52,19.177 101.219,27.305
  rectangle net GND: 76.581,15.494 79.883,18.415
  rectangle net GND: 68.834,17.653 82.296,25.527
  rectangle net GND: 76.708,57.277 131.191,61.214
  rectangle net GND: 127.254,42.545 136.271,61.214
  rectangle net GND: 76.835,60.579 143.256,66.04
  rectangle net GND: 52.07,57.912 72.39,65.909
  rectangle net GND: 71.247,51.435 77.216,66.04
  rectangle net GND: 73.406,47.879 77.597,66.04
  rectangle net GND: 69.469,51.308 74.041,53.721
  rectangle net GND: 70.358,46.99 75.057,48.768
  rectangle net GND: 68.58,46.863 70.485,50.292
  rectangle net GND: 65.278,50.165 70.485,56.896
  rectangle net GND: 60.452,36.576 65.913,46.609
  rectangle net GND: 70.612,39.878 75.565,43.942
  rectangle net GND: 49.53,43.561 76.454,47.498
  rectangle net GND: 74.295,35.052 77.597,47.117
  rectangle net GND: 76.454,33.909 102.87,35.941
  rectangle net GND: 60.325,2.794 67.183,13.208
  rectangle net GND: 128.778,21.336 135.128,25.019
  rectangle net GND: 134.239,21.336 143.002,55.626
  rectangle net GND: 134.321,21.336 138.43,40.259
  rectangle net GND: 124.587,30.734 138.811,34.036
  rectangle net GND: 120.777,26.924 131.445,40.513
  rectangle net GND: 110.871,38.227 137.668,43.053
  rectangle net GND: 52.07,23.114 67.564,37.211
Bottom Layer:
  rectangle net GND: 113.411,17.907 133.985,28.956
  rectangle net VDC: 107.569,29.718 143.129,43.434
  rectangle net VDC: 109.728,30.099 117.856,60.833
  rectangle net VDC: 91.313,57.15 118.11,66.04
  rectangle net NetD12_2: 133.985,55.626 142.875,60.579
  rectangle net NetD12_2: 118.999,50.546 135.636,60.833

## Silkscreen, mask and mechanical layers (free items; w line width, h text height)
Top Overlay:
  lines w0.254: 0.889,21.145 0.889,26.67 7.493,26.67 7.493,21.145 0.889,21.145 ; 2.032,57.404 2.032,62.928 8.636,62.928 8.636,57.404 2.032,57.404 ; 2.159,0.635 2.159,6.159 8.763,6.159 8.763,0.635 2.159,0.635
  text "HIN-1" at 3.243,60.96 h2
  text "LIN-1" at 3.384,58.166 h2
  text "+12V" at 1.905,24.828 h2
  text "GND" at 2.071,21.929 h2
  text "IR2110 500 Vdc max" at 105.264,7.78 h2
  text "!" at 122.682,5.588 h6
  text "IR2113 600 Vdc max" at 105.238,5.549 h2
  text "HIN-2" at 3.243,4.191 h2
  text "LIN-2" at 3.384,1.397 h2
  text "Github : @parhamsoltani" at 103.632,1.143 h2.2

## Text inside footprints (layer, text, board x,y; h text height)
D6: Top Overlay "K" at 2.032,41.656 h2